# EAGLE board untitled (EAGLE 9.6.2)

Size 100 x 80 mm. Coordinates in mm from the lower left corner, seen from the top.
Outline: 0,0 100,0 100,80 0,80 0,0
Copper layers (1*16): Top 0.035mm / dielectric 1.5mm / Bottom 0.035mm
Design rules "default": minimum track width 6mil, minimum drill 0.35mm, track to track 6mil, track to pad 6mil, pad to pad 6mil, via to via 6mil, smd to smd 6mil, copper to edge 40mil, drill to drill 6mil, minimum pad ring 10mil, minimum via ring 8mil, stop-mask expansion 4mil, vias tented up to drill 0mil, thermal gap 10mil

## Footprints (pad centres in the part's own frame; a part is rotated, then mirrored left to right if it is on the bottom)
RESC1005X40N = smd 0.51 x 0.6: 1 -0.445,0; 2 0.445,0
RESC1005X35N = smd 0.49 x 0.6: 1 -0.457,0; 2 0.457,0
RESC1608X55N = smd 0.79 x 0.93: 1 -0.82,0; 2 0.82,0
CAPC3216X190N = smd 1.29 x 1.91: 1 -1.46,0; 2 1.46,0
SOD2513X120N = smd 0.6 x 0.5: A 1.05,0; C -1.05,0
WL-TMRC_3MM = drill 1: 1 -1.27,0; 2 1.27,0
TE_1-1123723-2 = drill 1.65 square: 1 0,0 | drill 1.65: 2 3.96,0
SAMTEC_TS-102-G-A = drill 0.635 pad 0.985 square: 01 -1.27,0 | drill 0.635 pad 0.985: 02 1.27,0
TO126 = drill 1.118 long: 1 -2.286,-5.08; 2 0,-5.08; 3 2.286,-5.08 | hole 3.302: 0,5.08
RES_ERA3AEB152V = smd 0.65 x 0.9: 1 -0.725,0; 2 0.725,0
RESC1005X40N' = smd 0.54 x 0.6: 1 -0.432,0; 2 0.432,0
RES_ERA3AEB151V = smd 0.65 x 0.9: 1 -0.725,0; 2 0.725,0
SOIC127P599X175-8N = smd 1.97 x 0.6: 1 -2.47,1.905; 2 -2.47,0.635; 3 -2.47,-0.635; 4 -2.47,-1.905; 5 2.47,-1.905; 6 2.47,-0.635; 7 2.47,0.635; 8 2.47,1.905

## Placement (x,y rotation side)
100K  CRCW0402100KFKED  [RESC1005X40N]  29.21,72.39 180 top
100K_2  CRCW0402100KFKED  [RESC1005X40N]  15.24,57.15 180 top
150K  CPF0402B150KE1  [RESC1005X35N]  21.59,74.93 270 top
350OHM  RT0603DRE07352RL  [RESC1608X55N]  33.02,71.12 0 top
C2  GRM31CD80J107MEA8L  [CAPC3216X190N]  46.99,39.37 180 top
C4  GRM31CD80J107MEA8L  [CAPC3216X190N]  16.51,63.5 180 top
D1  1N4148WS-7-F  [SOD2513X120N]  49.53,74.93 0 top
D2  1N4148WS-7-F  [SOD2513X120N]  43.18,74.93 0 top
D3  1N4148WS-7-F  [SOD2513X120N]  35.56,74.93 0 top
D4  WL-TMRC_3MM_WITHOUTSTOPPER  [WL-TMRC_3MM]  80.01,25.4 270 top
J1  1-1123723-2  [TE_1-1123723-2]  35.56,13.97 0 top
J2  TS-102-G-A  [SAMTEC_TS-102-G-A]  25.4,31.75 180 top
J3  1-1123723-2  [TE_1-1123723-2]  19.05,13.97 0 top
Q1  BD139  [TO126]  71.12,13.97 180 top
R1  ERA3AEB152V  [RES_ERA3AEB152V]  63.5,24.13 0 top
R2  ERA3AEB152V  [RES_ERA3AEB152V]  17.78,24.13 0 top
R3  RC0402FR-07649RL  [RESC1005X40N']  50.8,71.12 180 top
R4  ERA3AEB151V  [RES_ERA3AEB151V]  15.24,50.8 180 top
U1  LM358DR  [SOIC127P599X175-8N]  25.4,40.64 180 top

## Library data of the parts
100K 100K_2 = CRCW0402100KFKED
150K = CPF0402B150KE1; AVAILABILITY: In Stock; CHECK_PRICES: https://www.snapeda.com/parts/CPF0402B150KE1/TE+Connectivity/view-part/?ref=eda; COMMENT: 3-1879216-2; DESCRIPTION: CPF0402 150K 0.1% 25PPM 1K RL; EU_ROHS_COMPLIANCE: Compliant; MF: TE Connectivity; MP: CPF0402B150KE1; PACKAGE: 0402; POWER_RATING: .063 W; PRICE: None; RESISTANCE: 150K; SNAPEDA_LINK: https://www.snapeda.com/parts/CPF0402B150KE1/TE+Connectivity/view-part/?ref=snap; TOLERANCE: .1%; VOLTAGE_RATING: 25 V
350OHM = RT0603DRE07352RL
C2 C4 = GRM31CD80J107MEA8L; CHECK_PRICES: https://www.snapeda.com/parts/GRM31CD80J107MEA8L/Murata/view-part/?ref=eda; DESCRIPTION: SMD capacitor X6T(EIA) with capacitance 100uF Tol.20%. Rated voltage 6.3Vdc 105C; DIGIKEY_PART_NUMBER: 490-GRM31CD80J107MEA8LTR-ND; MF: Murata; MP: GRM31CD80J107MEA8L; PACKAGE: 3216-2 Murata; SNAPEDA_LINK: https://www.snapeda.com/parts/GRM31CD80J107MEA8L/Murata/view-part/?ref=snap
D1-D3 = 1N4148WS-7-F; AVAILABILITY: In Stock; CHECK_PRICES: https://www.snapeda.com/parts/1N4148WS-7-F/Diodes+Inc./view-part/?ref=eda; DESCRIPTION: Diode Switching 75V 0.3A 2-Pin SOD-323 | Diodes Inc 1N4148WS-7-F; MF: Diodes Inc.; MP: 1N4148WS-7-F; PACKAGE: SOD-323 Diodes Inc.; PRICE: None; SNAPEDA_LINK: https://www.snapeda.com/parts/1N4148WS-7-F/Diodes+Inc./view-part/?ref=snap
D4 = WL-TMRC_3MM
J1 J3 = 1-1123723-2; AVAILABILITY: In Stock; CENTERLINE_PITCH: 3.96 mm[.156 in]; CHECK_PRICES: https://www.snapeda.com/parts/1-1123723-2/TE+Connectivity+AMP+Connectors/view-part/?ref=eda; COMMENT: 1-1123723-2; DESCRIPTION: Header, Conn,High Current,PCB Plug,2 Cont,Solder,Breakaway,0.156 Pin-Spng,7.5A | TE Connectivity 1-1123723-2; EU_ROHS_COMPLIANCE: Compliant; MF: TE Connectivity; MP: 1-1123723-2; NUMBER_OF_POSITIONS: 2; PACKAGE: None; PRICE: None; PRODUCT_TYPE: Header; SNAPEDA_LINK: https://www.snapeda.com/parts/1-1123723-2/TE+Connectivity+AMP+Connectors/view-part/?ref=snap
J2 = TS-102-G-A; MANUFACTURER: Samtec Inc.; PARTREV: R; STANDARD: Manufacturer Recommendations
Q1 = BD139_; AVAILABILITY: In Stock; CHECK_PRICES: https://www.snapeda.com/parts/BD139/STMicroelectronics/view-part/?ref=eda; DESCRIPTION: Bipolar (BJT) Transistor NPN 80 V 1.5 A - 1.25 W Through Hole SOT-32-3; MF: STMicroelectronics; MP: BD139; PACKAGE: TO-126 STMicroelectronics; PRICE: None; SNAPEDA_LINK: https://www.snapeda.com/parts/BD139/STMicroelectronics/view-part/?ref=snap
R1 R2 = ERA3AEB152V; MANUFACTURER: Panasonic; MAXIMUM_PACKAGE_HEIGHT: 0.45 mm; PARTREV: 3/1/2020; STANDARD: Manufacturer Recommendations
R3 = RC0402FR-07649RL
R4 = ERA3AEB151V; MANUFACTURER: Panasonic; MAXIMUM_PACKAGE_HEIGHT: 0.45 mm; PARTREV: 3/1/2020; STANDARD: Manufacturer Recommendations
U1 = LM358DR

## Nets
3.3V: J3.2 R1.1
+5V: J3.1 R2.2 U1.8
ADC2: J2.02 U1.5 U1.7
GROUND: 150K.1 C2.1 C4.1 D3.C J1.1 Q1.1 R3.1 R4.1 U1.4
N$1: Q1.3 R1.2
N$2: D2.C D3.A
N$3: 100K_2.1 350OHM.2 D1.A R3.2
N$4: D1.C D2.A
N$6: 100K.2 150K.2 C2.2 U1.2
N$8: 100K_2.2 C4.2 R4.2 U1.6
N$10: D4.1 R2.1
N$11: D4.2 Q1.2
N$12: J2.01 U1.1 U1.3
VIN: 100K.1 350OHM.1 J1.2

## Tracks (layer width: path | path; a pad name or v marks a point on that pad's centre or on a via)
3.3V  (1 unrouted)
+5V  (2 unrouted)
ADC2  (2 unrouted)
GROUND  (8 unrouted)
N$1  (1 unrouted)
N$2  (1 unrouted)
N$3  (3 unrouted)
N$4  (1 unrouted)
N$6  (3 unrouted)
N$8  (3 unrouted)
N$10  (1 unrouted)
N$11  (1 unrouted)
N$12  (2 unrouted)
VIN  (2 unrouted)